# Altium PCB SG_CAN_Board2.PcbDoc (part 1 of 2)
Units mil, origin at the board's own origin, x right, y up, seen from the top; angles counter-clockwise.
Board outline 6000 x 2800 mil, 4 copper layers (Top Layer, Int1 (GND), Int2 (PWR), Bottom Layer), stack 53.911 mil thick; 153 components, 115 nets, 479 pads, 87 vias.
Unrouted connection lines stored in the file: 153.
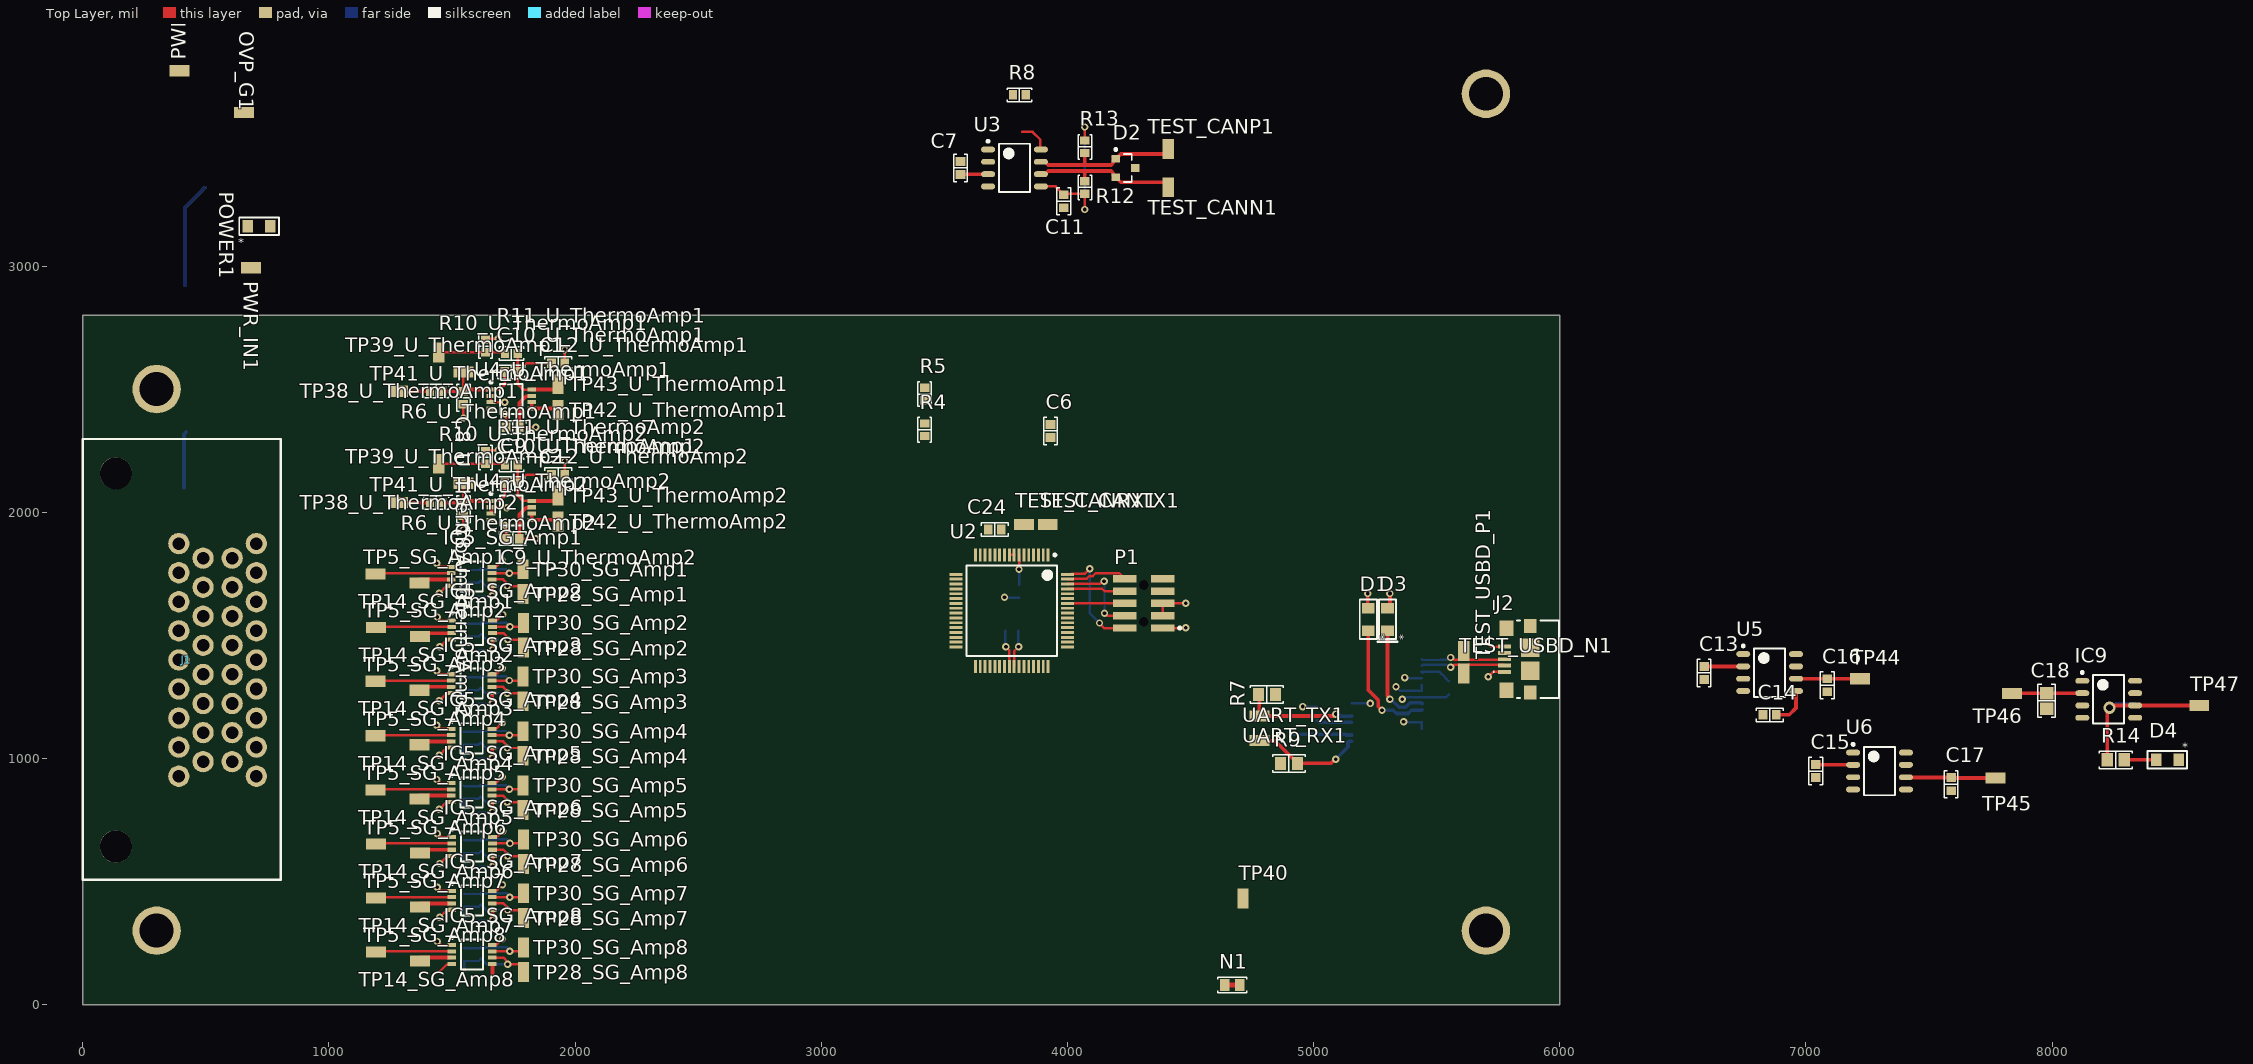
[diagram p0: Top Layer view]
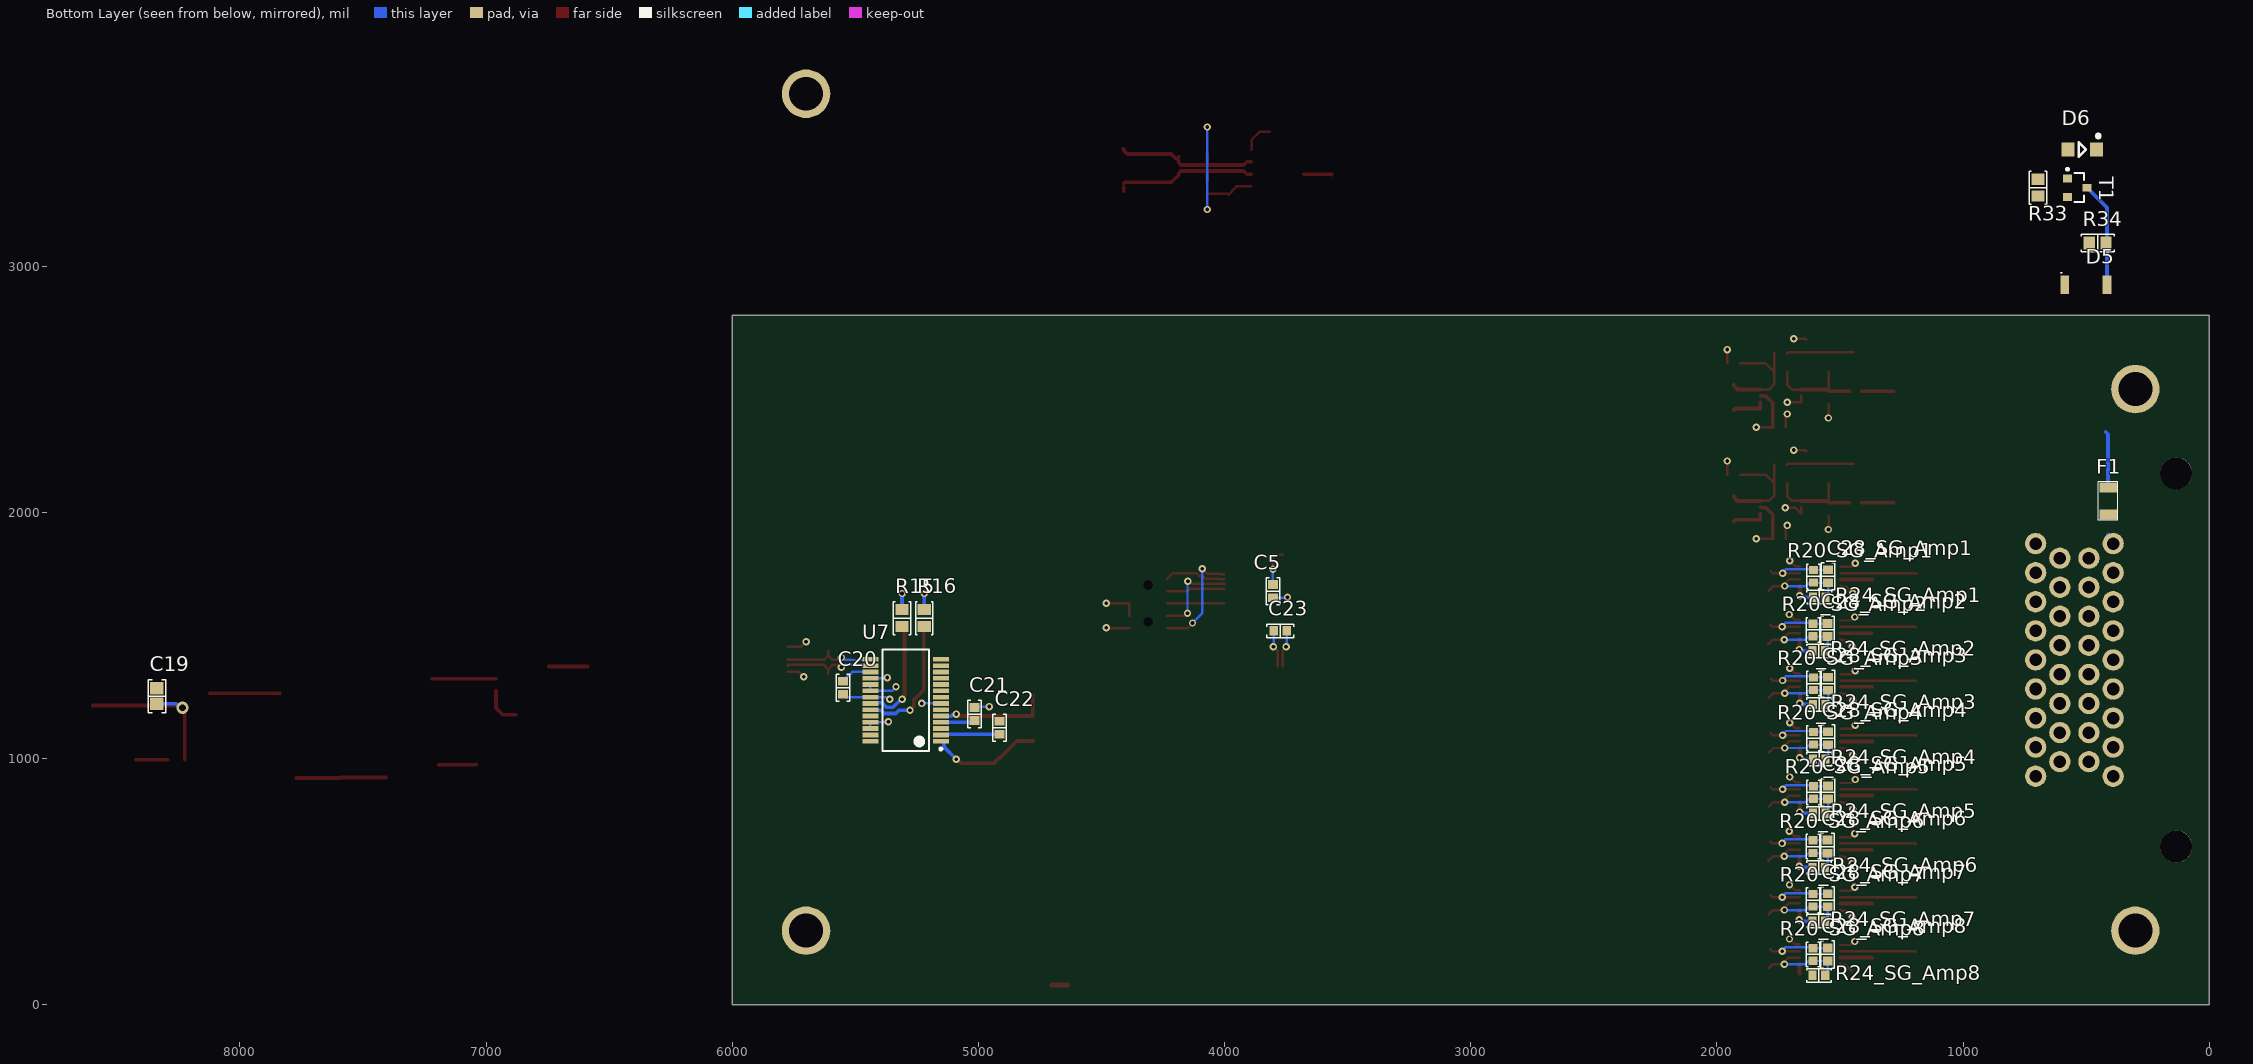
[diagram p1: Bottom Layer view, seen from below]
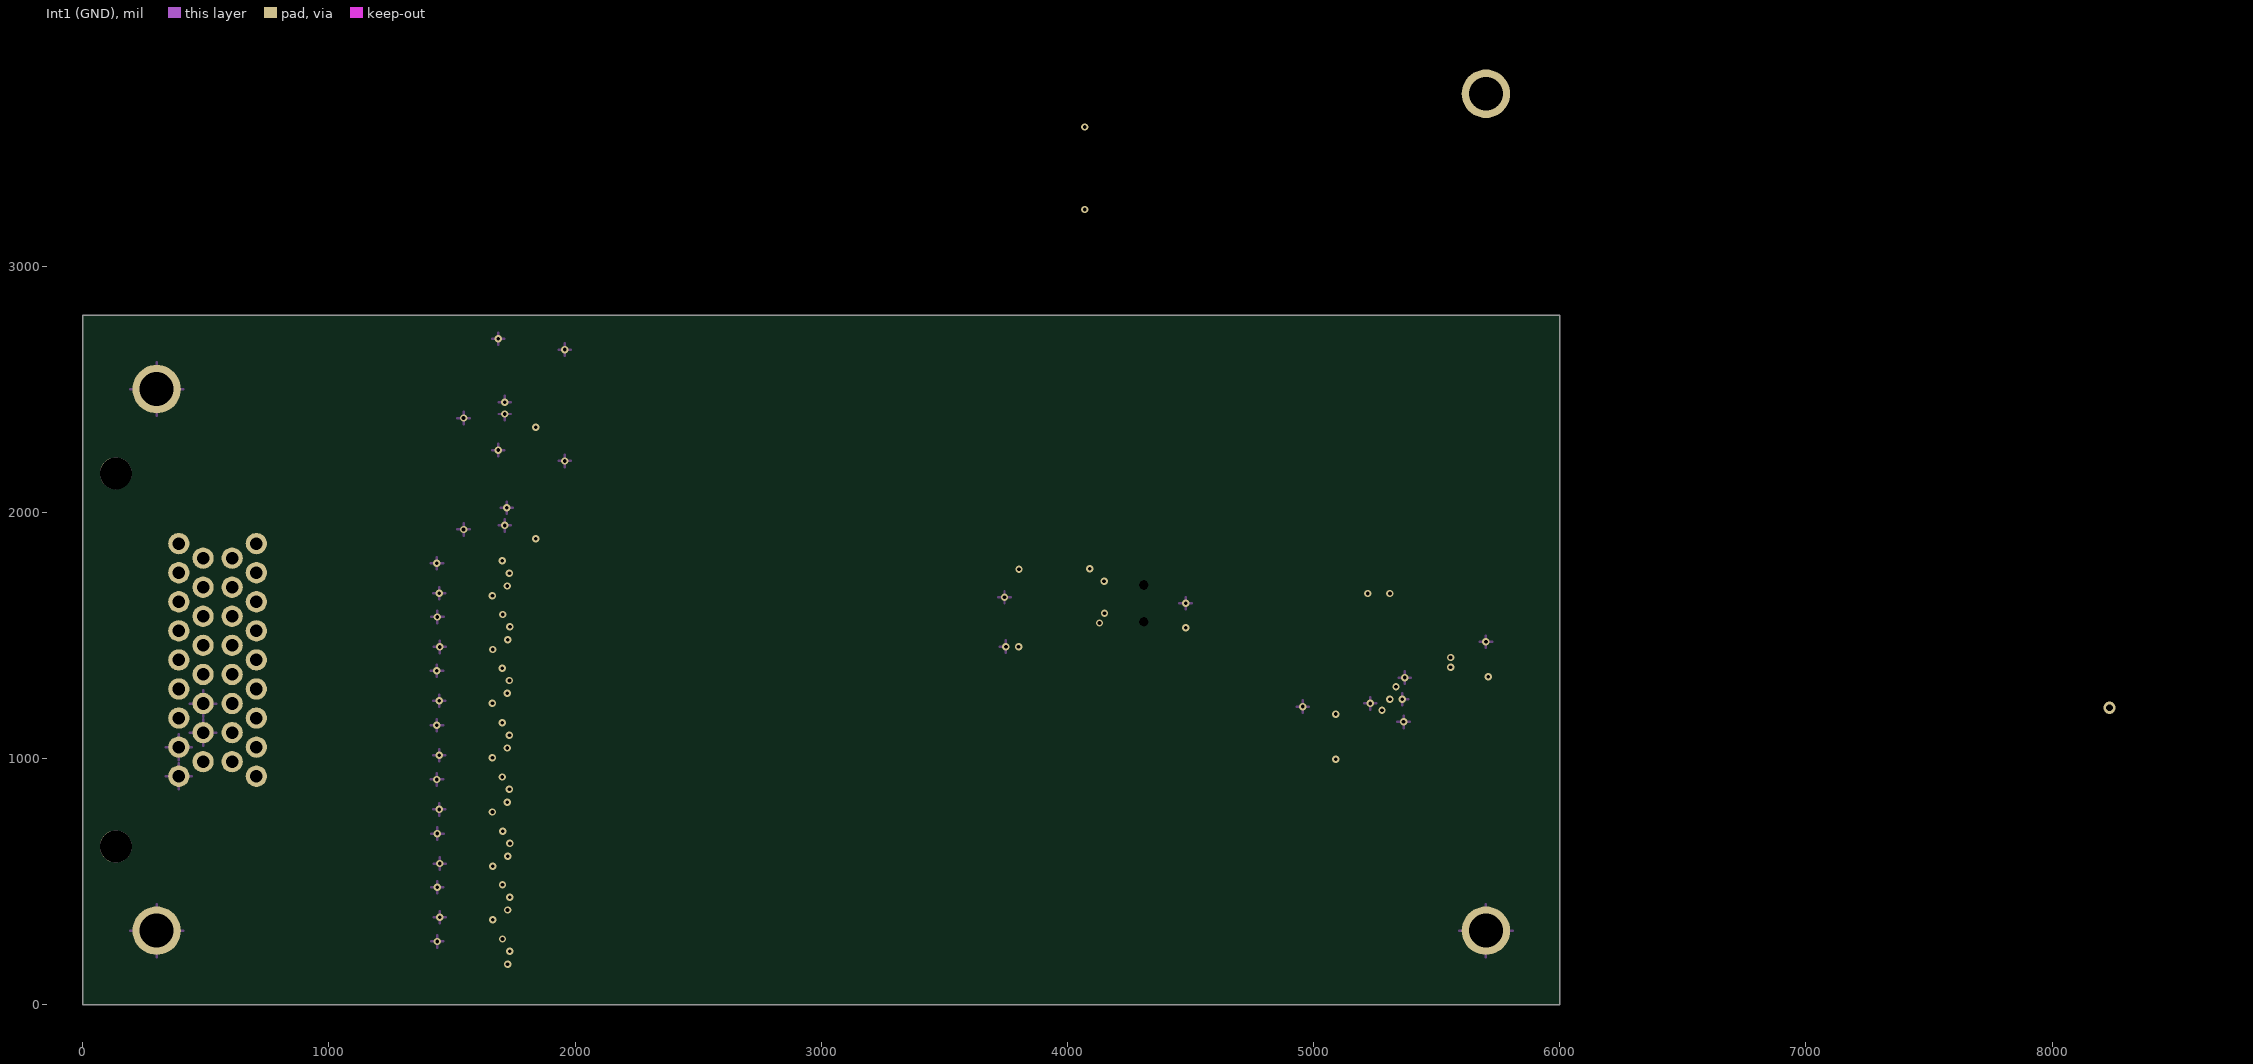
[diagram p2: Int1 (GND)]
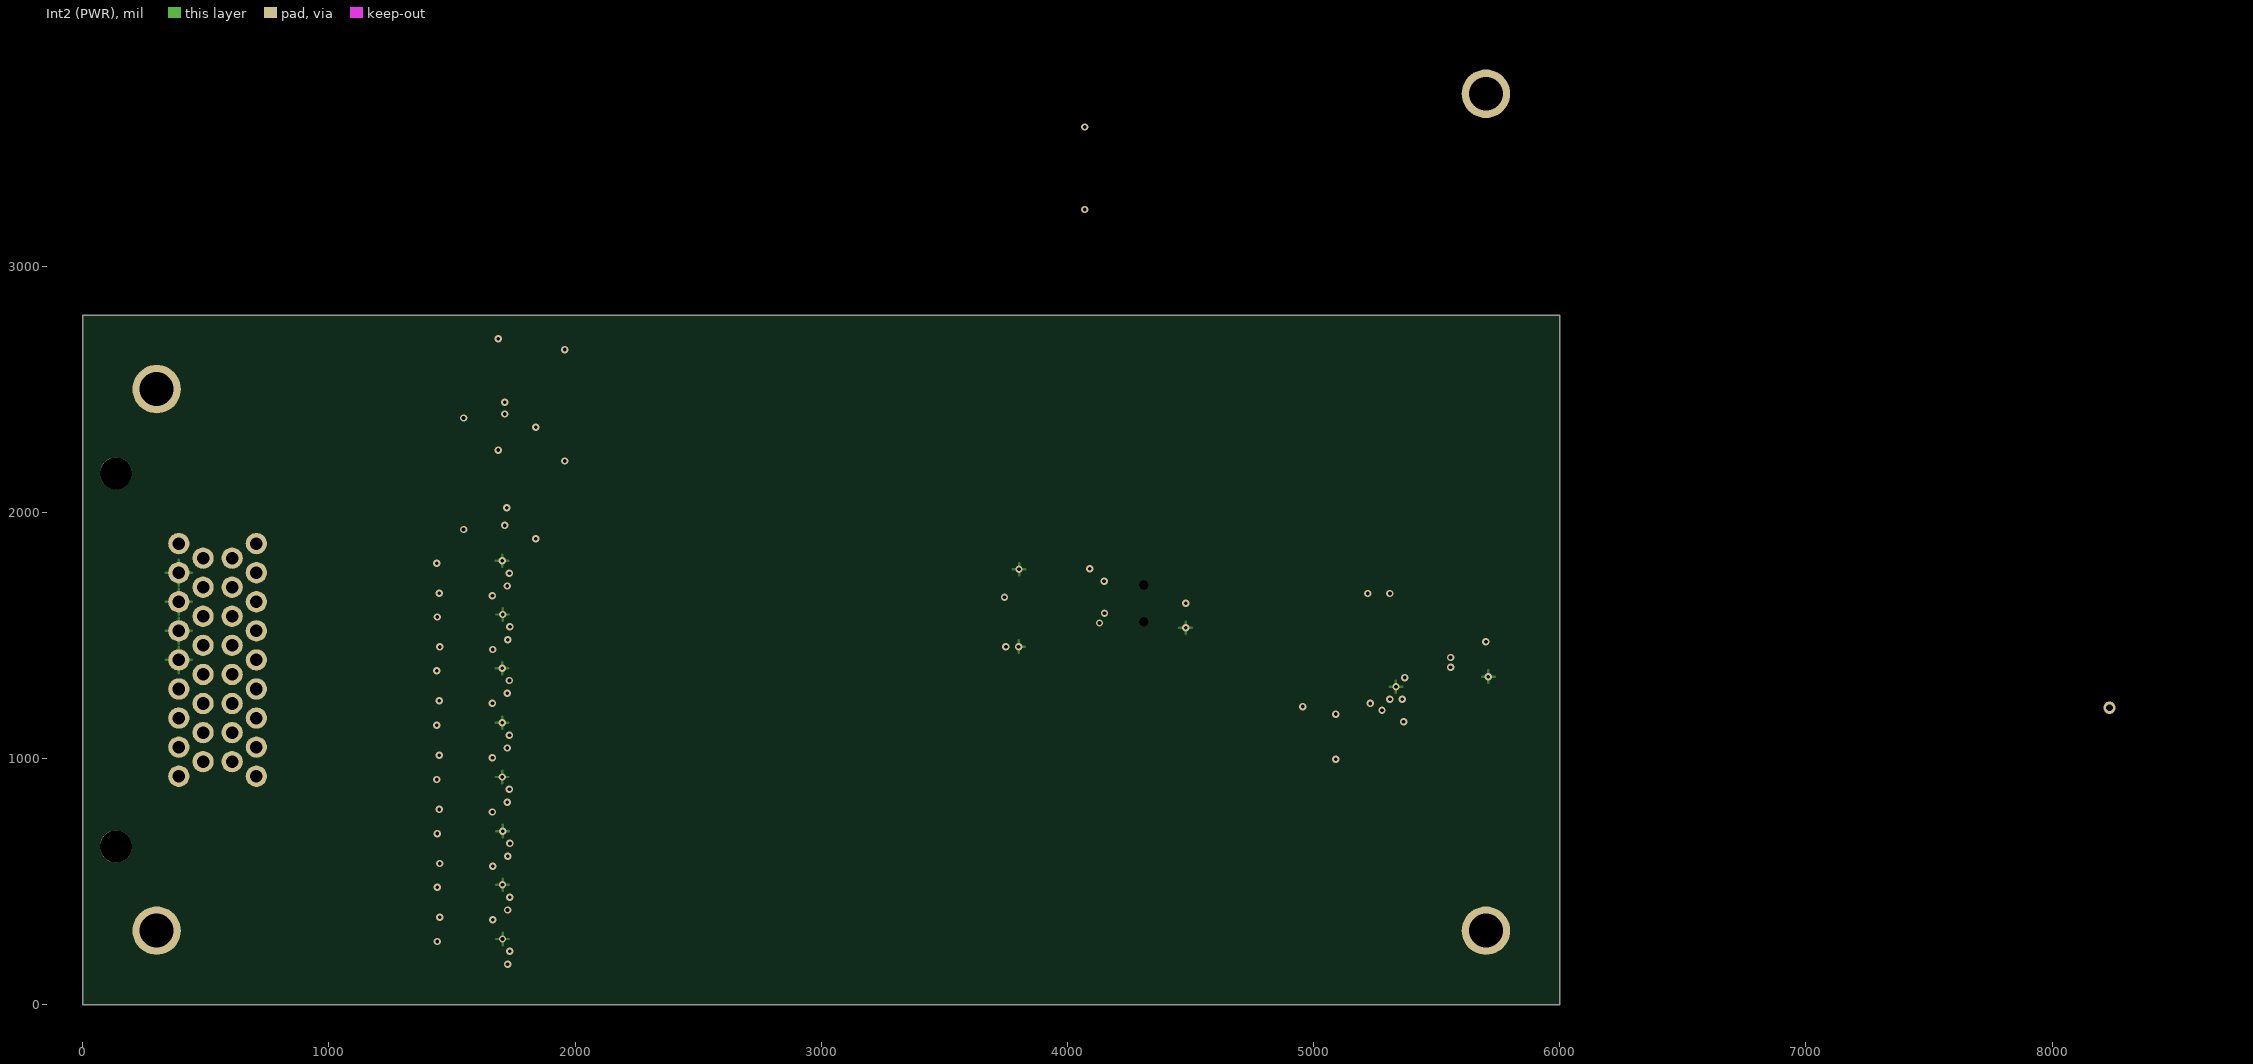
[diagram p3: Int2 (PWR)]

## Layer stack, top to bottom
Top Solder: solder mask 1, SM-001, Dk 4
Top Layer: signal copper 1.3778
Dielectric 1: prepreg 5.1, PP-017, Dk 4.3
Dielectric 2: prepreg 5.1, PP-017, Dk 4.3
Int1 (GND): signal copper 1.3778
Dielectric 3: core 28, Core-039, Dk 4.8
Int2 (PWR): signal copper 1.3778
Dielectric 4: prepreg 5.1, PP-017, Dk 4.3
Dielectric 5: prepreg 5.1, PP-017, Dk 4.3
Bottom Layer: signal copper 1.3778
Bottom Solder: solder mask 1, SM-001, Dk 4

## Board outline
0,0 6000,0 6000,2800 0,2800

## Design rules (kind name [scope] priority, off if disabled: settings)
Clearance [InNetClass('All Nets')] p1: gap=10 ignorepadtopadclearanceinfootprint=FALSE except(6: Arc-SMDPad Track-SMDPad SMDPad-SMDPad)
DiffPairsRouting [All] p1: maxlimit=100 minlimit=10 mostfreqgap=10 toplayer_minwidth=10 toplayer_maxwidth=100 toplayer_prefwidth=15 midlayer1_maxgap=10 midlayer1_minwidth=15 midlayer1_maxwidth=15 midlayer1_prefwidth=15 midlayer2_maxgap=10 midlayer2_minwidth=15 midlayer2_maxwidth=15 midlayer2_prefwidth=15 bottomlayer_minwidth=10 bottomlayer_maxwidth=100 bottomlayer_prefwidth=15 maxuncoupledlength=500
FabricationTestPointUsage TestPointUsage [All] p1: valid=0 allowmultiple=FALSE
FabricationTestPointUsage [All] p2: valid=0 allowmultiple=FALSE
FabricationTestpoint Testpoint [All] p1: side=3 testpointundercomponent=TRUE minsize=40 maxsize=100 preferedsize=60 minholesize=20 maxholesize=40 preferedholesize=32 testpointgrid=1 allowsidetop=TRUE allowsidebottom=TRUE usegrid=TRUE gridtolerance=0.01
FabricationTestpoint [All] p2: side=3 testpointundercomponent=TRUE minsize=40 maxsize=100 preferedsize=60 minholesize=0 maxholesize=40 preferedholesize=32 testpointgrid=1 allowsidetop=TRUE allowsidebottom=TRUE usegrid=TRUE gridtolerance=0.01
HoleSize [All] p1: absolutevalues=TRUE maxlimit=247 minlimit=10 maxpercent=80.000 minpercent=20.000
MatchedLengths "Schematic Matched Net Lengths" [InNet('D_N')] p1: tolerance=10 checknetsindiffpair=FALSE checkdiffpairvsdiffpair=TRUE checkxsignals=TRUE checkothers=TRUE
PasteMaskExpansion PasteMaskExpansion_1 [InComponent('P1')] p1: expansion=-150
PasteMaskExpansion [All] p2: expansion=0
PlaneClearance [All] p1: clearance=10
PlaneConnect [All] p1: planeconnectstyle=Relief reliefexpansion=15 reliefentries=4 reliefconductorwidth=10 reliefairgap=10
PolygonConnect [All] p1: connectstyle=Relief reliefconductorwidth=10 reliefentries=4 polygonreliefangle="90 Angle" airgapwidth=10
RoomDefinition U_RVP_OVP_LC [InComponentClass('U_RVP_OVP_LC')] p1: confinementstyle=ConfineIn formatcopy=TRUE lockcomponents=FALSE outline 825.94,4083.42 825.94,2803.42 -119.06,2803.42 -119.06,4083.42
RoomDefinition SG_CAN_System [InComponentClass('SG_CAN_System')] p2: confinementstyle=ConfineIn formatcopy=TRUE lockcomponents=FALSE outline 4299.49,40 5089.49,40 5089.49,530 4299.49,530
RoomDefinition SG_Amp8 [InComponentClass('SG_Amp8')] p3: confinementstyle=ConfineIn formatcopy=TRUE lockcomponents=FALSE outline 1115.98,72.17 2160.98,72.17 2160.98,288.74 1115.98,288.74
RoomDefinition SG_Amp7 [InComponentClass('SG_Amp7')] p4: confinementstyle=ConfineIn formatcopy=TRUE lockcomponents=FALSE outline 1115.98,292.17 2160.98,292.17 2160.98,508.74 1115.98,508.74
RoomDefinition SG_Amp6 [InComponentClass('SG_Amp6')] p5: confinementstyle=ConfineIn formatcopy=TRUE lockcomponents=FALSE outline 1116.28,510.39 2161.28,510.39 2161.28,726.96 1116.28,726.96
RoomDefinition SG_Amp5 [InComponentClass('SG_Amp5')] p6: confinementstyle=ConfineIn formatcopy=TRUE lockcomponents=FALSE outline 1114.35,730.32 2159.35,730.32 2159.35,946.89 1114.35,946.89
RoomDefinition SG_Amp4 [InComponentClass('SG_Amp4')] p7: confinementstyle=ConfineIn formatcopy=TRUE lockcomponents=FALSE outline 1114.35,950.39 2159.35,950.39 2159.35,1166.96 1114.35,1166.96
RoomDefinition SG_Amp3 [InComponentClass('SG_Amp3')] p8: confinementstyle=ConfineIn formatcopy=TRUE lockcomponents=FALSE outline 1114.35,1172.17 2159.35,1172.17 2159.35,1388.74 1114.35,1388.74
RoomDefinition SG_Amp2 [InComponentClass('SG_Amp2')] p9: confinementstyle=ConfineIn formatcopy=TRUE lockcomponents=FALSE outline 1116.28,1390.39 2161.28,1390.39 2161.28,1606.96 1116.28,1606.96
RoomDefinition SG_Amp1 [InComponentClass('SG_Amp1')] p10: confinementstyle=ConfineIn formatcopy=TRUE lockcomponents=FALSE outline 1114.35,1608.3 2159.35,1608.3 2159.35,1824.88 1114.35,1824.88
RoomDefinition U_USB [InComponentClass('U_USB')] p11: confinementstyle=ConfineIn formatcopy=TRUE lockcomponents=FALSE outline 4542.05,950 6020,950 6020,2050 4542.05,2050
RoomDefinition U_ThermoAmp2 [InComponentClass('U_ThermoAmp2')] p12: confinementstyle=ConfineIn formatcopy=TRUE lockcomponents=FALSE outline 1215.89,1837.44 2015.89,1837.44 2015.89,2287.44 1215.89,2287.44
RoomDefinition U_ThermoAmp1 [InComponentClass('U_ThermoAmp1')] p13: confinementstyle=ConfineIn formatcopy=TRUE lockcomponents=FALSE outline 1215.89,2290 2015.89,2290 2015.89,2740 1215.89,2740
RoomDefinition U_SG_Power_Supplies [InComponentClass('U_SG_Power_Supplies')] p14: confinementstyle=ConfineIn formatcopy=TRUE lockcomponents=FALSE outline 6497.6,543.58 9202.6,543.58 9202.6,1783.58 6497.6,1783.58
RoomDefinition U_MCU_MKE185F512VLH16 [InComponentClass('U_MCU_MKE185F512VLH16')] p15: confinementstyle=ConfineIn formatcopy=TRUE lockcomponents=FALSE outline 4450,795 4450,2725 3287.24,2725 3287.24,795
RoomDefinition U_CAN_Tranceiver [InComponentClass('U_CAN_Tranceiver')] p16: confinementstyle=ConfineIn formatcopy=TRUE lockcomponents=FALSE outline 3505.47,3108.42 4575.47,3108.42 4575.47,3738.42 3505.47,3738.42
RoomDefinition U_36Pin_SuperSeal_Conn [InComponentClass('U_36Pin_SuperSeal_Conn')] p17: confinementstyle=ConfineIn formatcopy=TRUE lockcomponents=FALSE outline 995.75,2978.58 -3480,2978.58 -3480,433.07 995.75,433.07
RoutingVias [All] p1: holewidth=15 width=30 viastyle="Through Hole" minholewidth=10 minwidth=20 maxholewidth=15 maxwidth=50
SilkToSolderMaskClearance SilkscreenOverComponentPads [IsPad] p1: minsilkscreentomaskgap=10 clearancetoexposedcopper=TRUE
SilkToSolderMaskClearance [IsPad] p2: minsilkscreentomaskgap=10 clearancetoexposedcopper=TRUE
SolderMaskExpansion [All] p1: expansion=5
UnRoutedNet [All] p1: checkbadconnections=TRUE
Width [All] p1: maxlimit=150 minlimit=5 preferedwidth=15 toplayer_minwidth=10 bottomlayer_minwidth=10 minimp=50.000000 maximp=50.000000 favimp=50.000000
21 further rules are at their usual default settings.

## Classes and differential pairs
channel class SG_Amplifiers_LTC2053: SG_Amp1 SG_Amp2 SG_Amp3 SG_Amp4 SG_Amp5 SG_Amp6 SG_Amp7 SG_Amp8
net class TC-[1..2]: TC-1 TC-2 TC-3 TC-4 TC-5 TC-6 TC-7 TC-8
net class TC+[1..2]: TC+1 TC+2 TC+3 TC+4 TC+5 TC+6 TC+7 TC+8
component class SG_CAN_System: N1 TP40
component class SG_Amp8: C28_SG_Amp8 IC5_SG_Amp8 R20_SG_Amp8 R24_SG_Amp8 TP5_SG_Amp8 TP14_SG_Amp8 TP28_SG_Amp8 TP30_SG_Amp8
component class SG_Amp7: C28_SG_Amp7 IC5_SG_Amp7 R20_SG_Amp7 R24_SG_Amp7 TP5_SG_Amp7 TP14_SG_Amp7 TP28_SG_Amp7 TP30_SG_Amp7
component class SG_Amp6: C28_SG_Amp6 IC5_SG_Amp6 R20_SG_Amp6 R24_SG_Amp6 TP5_SG_Amp6 TP14_SG_Amp6 TP28_SG_Amp6 TP30_SG_Amp6
component class SG_Amp5: C28_SG_Amp5 IC5_SG_Amp5 R20_SG_Amp5 R24_SG_Amp5 TP5_SG_Amp5 TP14_SG_Amp5 TP28_SG_Amp5 TP30_SG_Amp5
component class SG_Amp4: C28_SG_Amp4 IC5_SG_Amp4 R20_SG_Amp4 R24_SG_Amp4 TP5_SG_Amp4 TP14_SG_Amp4 TP28_SG_Amp4 TP30_SG_Amp4
component class SG_Amp3: C28_SG_Amp3 IC5_SG_Amp3 R20_SG_Amp3 R24_SG_Amp3 TP5_SG_Amp3 TP14_SG_Amp3 TP28_SG_Amp3 TP30_SG_Amp3
component class SG_Amp2: C28_SG_Amp2 IC5_SG_Amp2 R20_SG_Amp2 R24_SG_Amp2 TP5_SG_Amp2 TP14_SG_Amp2 TP28_SG_Amp2 TP30_SG_Amp2
component class SG_Amp1: C28_SG_Amp1 IC5_SG_Amp1 R20_SG_Amp1 R24_SG_Amp1 TP5_SG_Amp1 TP14_SG_Amp1 TP28_SG_Amp1 TP30_SG_Amp1 TP$$$
channel class ThermocoupleAmplifiersAD8494: U_ThermoAmp1 U_ThermoAmp2
net class TCO[1..2]: TCO1 TCO2
net class SGO[1..8]: SGO1 SGO2 SGO3 SGO4 SGO5 SGO6 SGO7 SGO8
net class SG-[1..8]: SG-1 SG-2 SG-3 SG-4 SG-5 SG-6 SG-7 SG-8
net class SG+[1..8]: SG+1 SG+2 SG+3 SG+4 SG+5 SG+6 SG+7 SG+8
component class U_USB: C20 C21 C22 D1 D3 J2 R7 R9 R15 R16 TEST_USBD_N1 TEST_USBD_P1 U7 UART_RX1 UART_TX1
component class U_ThermoAmp2: C8_U_ThermoAmp2 C9_U_ThermoAmp2 C10_U_ThermoAmp2 C12_U_ThermoAmp2 R6_U_ThermoAmp2 R10_U_ThermoAmp2 R11_U_ThermoAmp2 TP38_U_ThermoAmp2 TP39_U_ThermoAmp2 TP41_U_ThermoAmp2 TP42_U_ThermoAmp2 TP43_U_ThermoAmp2 U4_U_ThermoAmp2
component class U_ThermoAmp1: C8_U_ThermoAmp1 C9_U_ThermoAmp1 C10_U_ThermoAmp1 C12_U_ThermoAmp1 R6_U_ThermoAmp1 R10_U_ThermoAmp1 R11_U_ThermoAmp1 TP38_U_ThermoAmp1 TP39_U_ThermoAmp1 TP41_U_ThermoAmp1 TP42_U_ThermoAmp1 TP43_U_ThermoAmp1 U4_U_ThermoAmp1
component class U_SG_Power_Supplies: C13 C14 C15 C16 C17 C18 C19 D4 IC9 R14 TP44 TP45 TP46 TP47 U5 U6
component class U_RVP_OVP_LC: D5 D6 OVP_G1 POWER1 PWR_IN1 PWR_OUT1 R33 R34 T1
component class U_MCU_MKE185F512VLH16: C5 C6 C23 C24 P1 R4 R5 TEST_CANRX1 TEST_CANTX1 U2
component class U_CAN_Tranceiver: C7 C11 D2 R8 R12 R13 TEST_CANN1 TEST_CANP1 U3
component class U_36Pin_SuperSeal_Conn: F1 J1
differential pair D: +D_P -D_N
differential pair CAN: +CAN_P -CAN_N

## Components (designator, comment, footprint, x,y, rotation, side; value= is the part's Value field where it differs from the comment)
C5 "Capacitor MLCC 0.10uf 25V CAP 0603/1608" "CAP 0603/1608" 3803.31,1679.53 r90 bottom value=0.10uf (schematic designator C6)
C6 "Capacitor MLCC 0.10uf 16V CAP 0603/1608" "CAP 0603/1608" 3931.42,2330 r270 top value=0.10uf (schematic designator C13)
C7 "Capacitor MLCC 0.10uf 50V CAP 0603/1608" "CAP 0603/1608" 3565.47,3398.42 r270 top value=0.10uf (schematic designator C9)
C8_U_ThermoAmp1 "Capacitor MLCC 1000pf 16V CAP 0603/1608" "CAP 0603/1608" 1545.89,2465 r90 top value=1000pf (schematic designator C8)
C8_U_ThermoAmp2 "Capacitor MLCC 1000pf 16V CAP 0603/1608" "CAP 0603/1608" 1545.89,2012.44 r90 top value=1000pf (schematic designator C8)
C9_U_ThermoAmp1 "Capacitor MLCC 0.10uf 16V CAP 0603/1608" "CAP 0603/1608" 1745.89,2345 r0 top value=0.10uf (schematic designator C9)
C9_U_ThermoAmp2 "Capacitor MLCC 0.10uf 16V CAP 0603/1608" "CAP 0603/1608" 1745.89,1892.44 r0 top value=0.10uf (schematic designator C9)
C10_U_ThermoAmp1 "Capacitor MLCC 0.010uf 16V CAP 0603/1608" "CAP 0603/1608" 1740.89,2570 r0 top value=0.010uf (schematic designator C10)
C10_U_ThermoAmp2 "Capacitor MLCC 0.010uf 16V CAP 0603/1608" "CAP 0603/1608" 1740.89,2117.44 r0 top value=0.010uf (schematic designator C10)
C11 "Capacitor MLCC 4700pf 50V CAP 0603/1608" "CAP 0603/1608" 3985,3263.43 r90 top value=4700pf (schematic designator C14)
C12_U_ThermoAmp1 "Capacitor MLCC 1000pf 16V CAP 0603/1608" "CAP 0603/1608" 1930.89,2605 r0 top value=1000pf (schematic designator C12)
C12_U_ThermoAmp2 "Capacitor MLCC 1000pf 16V CAP 0603/1608" "CAP 0603/1608" 1930.89,2152.44 r0 top value=1000pf (schematic designator C12)
C13 "Capacitor MLCC 1.0uf 25V CAP 0603/1608" "CAP 0603/1608" 6586.57,1347.01 r90 top value=1.0uf (schematic designator C16)
C14 "Capacitor MLCC 1.0uf 25V CAP 0603/1608" "CAP 0603/1608" 6852.6,1177.01 r0 top value=1.0uf (schematic designator C17)
C15 "Capacitor MLCC 2.2uf 25V CAP 0603/1608" "CAP 0603/1608" 7040,948.58 r90 top value=2.2uf (schematic designator C18)
C16 "Capacitor MLCC 22uf 16V CAP 0603/1608" "CAP 0603/1608" 7086.57,1297.01 r90 top value=22uf (schematic designator C19)
C17 "Capacitor MLCC 2.2uf 25V CAP 0603/1608" "CAP 0603/1608" 7590,895.58 r90 top value=2.2uf (schematic designator C20)
C18 "Capacitor MLCC 2.2uf 25V CAP 0805/2012" "CAP 0805/2012" 7977.84,1233.58 r90 top value=2.2uf (schematic designator C21)
C19 "Capacitor MLCC 2.2uf 25V CAP 0805/2012" "CAP 0805/2012" 8337.28,1253.27 r270 bottom value=2.2uf (schematic designator C22)
C20 "Capacitor MLCC 0.10uf 25V CAP 0603/1608" "CAP 0603/1608" 5550,1286.57 r90 bottom value=0.10uf (schematic designator C1)
C21 "Capacitor MLCC 0.10uf 25V CAP 0603/1608" "CAP 0603/1608" 5016.14,1180 r270 bottom value=0.10uf (schematic designator C32)
C22 "Capacitor MLCC 0.10uf 25V CAP 0603/1608" "CAP 0603/1608" 4913.94,1124.13 r90 bottom value=0.10uf (schematic designator C31)
C23 "Capacitor MLCC 100pf 25V CAP 0603/1608" "CAP 0603/1608" 3773.79,1518.11 r0 bottom value=100pf (schematic designator C7)
C24 "Capacitor MLCC 0.10uf 25V CAP 0603/1608" "CAP 0603/1608" 3704.89,1930 r0 top value=0.10uf (schematic designator C8)
C28_SG_Amp1 "Capacitor MLCC 0.015uf 25V CAP 0603/1608" "CAP 0603/1608" 1548.37,1739.61 r90 bottom value=0.015uf (schematic designator C28)
C28_SG_Amp2 "Capacitor MLCC 0.015uf 25V CAP 0603/1608" "CAP 0603/1608" 1550.3,1521.69 r90 bottom value=0.015uf (schematic designator C28)
C28_SG_Amp3 "Capacitor MLCC 0.015uf 25V CAP 0603/1608" "CAP 0603/1608" 1548.37,1303.47 r90 bottom value=0.015uf (schematic designator C28)
C28_SG_Amp4 "Capacitor MLCC 0.015uf 25V CAP 0603/1608" "CAP 0603/1608" 1548.37,1081.69 r90 bottom value=0.015uf (schematic designator C28)
C28_SG_Amp5 "Capacitor MLCC 0.015uf 25V CAP 0603/1608" "CAP 0603/1608" 1548.37,861.62 r90 bottom value=0.015uf (schematic designator C28)
C28_SG_Amp6 "Capacitor MLCC 0.015uf 25V CAP 0603/1608" "CAP 0603/1608" 1550.3,641.69 r90 bottom value=0.015uf (schematic designator C28)
C28_SG_Amp7 "Capacitor MLCC 0.015uf 25V CAP 0603/1608" "CAP 0603/1608" 1550,423.47 r90 bottom value=0.015uf (schematic designator C28)
C28_SG_Amp8 "Capacitor MLCC 0.015uf 25V CAP 0603/1608" "CAP 0603/1608" 1550,203.47 r90 bottom value=0.015uf (schematic designator C28)
D1 "" 0805_LED 5222.48,1564.13 r270 top value=Green (schematic designator D2)
D2 "NUP1105LT1G" "SOT-23 (TO-236)" 4235.47,3398.43 r0 top value=TVS_24V (schematic designator D3)
D3 "" 0805_LED 5300,1564.13 r270 top value=Red (schematic designator D1)
D4 "LED" 0805_LED 8468.85,994.26 r0 top value=Green (schematic designator D6)
D5 "DIODE" SOD-128 500.94,2923.42 r180 bottom value=5A (schematic designator D2)
D6 "DDZ9701-7" SOD123F 515.47,3473.42 r180 bottom value=14Vz (schematic designator D1)
F1 "1A" "PTC Fuse 1206/3216" 410.71,2045.51 r90 bottom
IC5_SG_Amp1 "" MSOP-8 1579.35,1739.6 r0 top (schematic designator IC5)
IC5_SG_Amp2 "" MSOP-8 1581.28,1521.69 r0 top (schematic designator IC5)
IC5_SG_Amp3 "" MSOP-8 1579.35,1303.47 r0 top (schematic designator IC5)
IC5_SG_Amp4 "" MSOP-8 1579.35,1081.69 r0 top (schematic designator IC5)
IC5_SG_Amp5 "" MSOP-8 1579.35,861.62 r0 top (schematic designator IC5)
IC5_SG_Amp6 "" MSOP-8 1581.28,641.69 r0 top (schematic designator IC5)
IC5_SG_Amp7 "" MSOP-8 1580.98,423.47 r0 top (schematic designator IC5)
IC5_SG_Amp8 "" MSOP-8 1580.98,203.47 r0 top (schematic designator IC5)
IC9 "MAX6350CSA+ 5V" SOIC-8 8230,1240 r0 top value=5V (schematic designator IC1)
J1 "CONN Superseal 34POS" "Superseal 34POS" 704.96,1872.44 r270 top locked value=CONN (schematic designator J2)
J2 "1981568-1" TECO-1981568-5_V 5774.68,1402.76 r90 top locked value=CONN (schematic designator J1)
N1 "" Net_Tie 4669.49,80 r0 top
OVP_G1 "RCU-0C" RCU-0C 655.47,3623.42 r90 top
P1 "5103309-1" HDR2X5_SMT 4310,1629.53 r90 top value=CONN
POWER1 "LED" 0805_LED 715.47,3162 r180 top value=Green
PWR_IN1 "RCU-0C" RCU-0C 682.87,2993.42 r270 top
PWR_OUT1 "RCU-0C" RCU-0C 392.87,3793.42 r90 top
R4 "Resistor 10k 0603 1/10W 1%" "RES 0603/1608" 3420,2335 r90 top value=10k (schematic designator R13)
R5 "Resistor 10k 0603 1/10W 5%" "RES 0603/1608" 3420,2480 r270 top value=10k (schematic designator R12)
R6_U_ThermoAmp1 "Resistor 10k 0603 1/10W 10%" "RES 0603/1608" 1435.89,2491.57 r0 top value=10k (schematic designator R6)
R6_U_ThermoAmp2 "Resistor 10k 0603 1/10W 10%" "RES 0603/1608" 1435.89,2039.02 r0 top value=10k (schematic designator R6)
R7 "Resistor 1.0k 0805 1/4W 1%" "RES 0805/2012" 4810,1260 r0 top value=1.0k (schematic designator R2)
R8 "Resistor 100 0603 1/10W 10%" "RES 0603/1608" 3804.57,3695.59 r0 top value=100 (schematic designator R7)
R9 "Resistor 1.0k 0805 1/4W 1%" "RES 0805/2012" 4900,980 r180 top value=1.0k (schematic designator R1)
R10_U_ThermoAmp1 "Resistor 1.0M 0603 1/10W 5%" "RES 0603/1608" 1635.89,2675 r270 top value=1.0M (schematic designator R10)
R10_U_ThermoAmp2 "Resistor 1.0M 0603 1/10W 5%" "RES 0603/1608" 1635.89,2222.44 r270 top value=1.0M (schematic designator R10)
R11_U_ThermoAmp1 "Resistor 10k 0603 1/10W 10%" "RES 0603/1608" 1740.89,2645 r180 top value=10k (schematic designator R11)
R11_U_ThermoAmp2 "Resistor 10k 0603 1/10W 10%" "RES 0603/1608" 1740.89,2192.44 r180 top value=10k (schematic designator R11)
R12 "Resistor 62 0603 1/10W 5%" "RES 0603/1608" 4070.47,3319.37 r270 top value=62 (schematic designator R10)
R13 "Resistor 62 0603 1/10W 5%" "RES 0603/1608" 4070.47,3484.37 r270 top value=62 (schematic designator R11)
R14 "Resistor 470 0805 1/10W 1%" "RES 0805/2012" 8258.54,994.25 r0 top value=470 (schematic designator R1)
R15 "Resistor 1.0k 0805 1/4W 1%" "RES 0805/2012" 5310,1570.08 r270 bottom value=1.0k (schematic designator R32)
R16 "Resistor 1.0k 0805 1/4W 1%" "RES 0805/2012" 5220,1570.08 r270 bottom value=1.0k (schematic designator R31)
R20_SG_Amp1 "Resistor 10k 0603 1/10W 1%" "RES 0603/1608" 1607.89,1739.6 r90 bottom value=10k (schematic designator R20)
R20_SG_Amp2 "Resistor 10k 0603 1/10W 1%" "RES 0603/1608" 1609.82,1521.69 r90 bottom value=10k (schematic designator R20)
R20_SG_Amp3 "Resistor 10k 0603 1/10W 1%" "RES 0603/1608" 1607.89,1303.47 r90 bottom value=10k (schematic designator R20)
R20_SG_Amp4 "Resistor 10k 0603 1/10W 1%" "RES 0603/1608" 1607.89,1081.69 r90 bottom value=10k (schematic designator R20)
R20_SG_Amp5 "Resistor 10k 0603 1/10W 1%" "RES 0603/1608" 1607.89,861.62 r90 bottom value=10k (schematic designator R20)
R20_SG_Amp6 "Resistor 10k 0603 1/10W 1%" "RES 0603/1608" 1609.82,641.69 r90 bottom value=10k (schematic designator R20)
R20_SG_Amp7 "Resistor 10k 0603 1/10W 1%" "RES 0603/1608" 1609.53,423.47 r90 bottom value=10k (schematic designator R20)
R20_SG_Amp8 "Resistor 10k 0603 1/10W 1%" "RES 0603/1608" 1609.53,203.47 r90 bottom value=10k (schematic designator R20)
R24_SG_Amp1 "Resistor 10 0603 1/10W 1%" "RES 0603/1608" 1583.88,1654.88 r180 bottom value=10 (schematic designator R24)
R24_SG_Amp2 "Resistor 10 0603 1/10W 1%" "RES 0603/1608" 1585.81,1436.96 r180 bottom value=10 (schematic designator R24)
R24_SG_Amp3 "Resistor 10 0603 1/10W 1%" "RES 0603/1608" 1583.88,1218.74 r180 bottom value=10 (schematic designator R24)
R24_SG_Amp4 "Resistor 10 0603 1/10W 1%" "RES 0603/1608" 1583.88,996.96 r180 bottom value=10 (schematic designator R24)
R24_SG_Amp5 "Resistor 10 0603 1/10W 1%" "RES 0603/1608" 1583.88,776.89 r180 bottom value=10 (schematic designator R24)
R24_SG_Amp6 "Resistor 10 0603 1/10W 1%" "RES 0603/1608" 1585.81,556.96 r180 bottom value=10 (schematic designator R24)
R24_SG_Amp7 "Resistor 10 0603 1/10W 1%" "RES 0603/1608" 1585.51,338.74 r180 bottom value=10 (schematic designator R24)
R24_SG_Amp8 "Resistor 10 0603 1/10W 1%" "RES 0603/1608" 1585.51,118.74 r180 bottom value=10 (schematic designator R24)
R33 "Resistor 47k 0805 1/10W 1%" "RES 0805/2012" 695.47,3318.42 r90 bottom value=47k (schematic designator R4)
R34 "Resistor 470 0805 1/10W 1%" "RES 0805/2012" 452.87,3093.42 r180 bottom value=470 (schematic designator R3)
T1 "DMG2302UK-7" SOT23-3 535.94,3318.42 r180 bottom value=N_Channel
TEST_CANN1 "RCU-0C" RCU-0C 4409.27,3320.27 r180 top
TEST_CANP1 "RCU-0C" RCU-0C 4409.27,3475.59 r180 top
TEST_CANRX1 "RCU-0C" RCU-0C 3823,1950 r270 top
TEST_CANTX1 "RCU-0C" RCU-0C 3920,1950 r270 top
TEST_USBD_N1 "RCU-0C" RCU-0C 5610,1344.06 r180 top
TEST_USBD_P1 "RCU-0C" RCU-0C 5610,1435.53 r180 top
TP5_SG_Amp1 "RCU-0C" RCU-0C 1189.35,1749.6 r90 top value=CONN (schematic designator TP5)
TP5_SG_Amp2 "RCU-0C" RCU-0C 1191.28,1531.69 r90 top value=CONN (schematic designator TP5)
TP5_SG_Amp3 "RCU-0C" RCU-0C 1189.35,1313.47 r90 top value=CONN (schematic designator TP5)
TP5_SG_Amp4 "RCU-0C" RCU-0C 1189.35,1091.69 r90 top value=CONN (schematic designator TP5)
TP5_SG_Amp5 "RCU-0C" RCU-0C 1189.35,871.62 r90 top value=CONN (schematic designator TP5)
TP5_SG_Amp6 "RCU-0C" RCU-0C 1191.28,651.69 r90 top value=CONN (schematic designator TP5)
TP5_SG_Amp7 "RCU-0C" RCU-0C 1190.98,433.47 r90 top value=CONN (schematic designator TP5)
TP5_SG_Amp8 "RCU-0C" RCU-0C 1190.98,213.47 r90 top value=CONN (schematic designator TP5)
TP14_SG_Amp1 "RCU-0C" RCU-0C 1368.37,1713.03 r90 top value=CONN (schematic designator TP14)
TP14_SG_Amp2 "RCU-0C" RCU-0C 1370.3,1495.12 r90 top value=CONN (schematic designator TP14)
TP14_SG_Amp3 "RCU-0C" RCU-0C 1368.37,1276.9 r90 top value=CONN (schematic designator TP14)
TP14_SG_Amp4 "RCU-0C" RCU-0C 1368.37,1055.12 r90 top value=CONN (schematic designator TP14)
TP14_SG_Amp5 "RCU-0C" RCU-0C 1368.37,835.05 r90 top value=CONN (schematic designator TP14)
TP14_SG_Amp6 "RCU-0C" RCU-0C 1370.3,615.12 r90 top value=CONN (schematic designator TP14)
TP14_SG_Amp7 "RCU-0C" RCU-0C 1370,396.9 r90 top value=CONN (schematic designator TP14)
TP14_SG_Amp8 "RCU-0C" RCU-0C 1370,176.9 r90 top value=CONN (schematic designator TP14)
TP28_SG_Amp1 "RCU-0C" RCU-0C 1788.36,1668.3 r180 top value=CONN (schematic designator TP28)
TP28_SG_Amp2 "RCU-0C" RCU-0C 1790.3,1450.39 r180 top value=CONN (schematic designator TP28)
TP28_SG_Amp3 "RCU-0C" RCU-0C 1788.36,1232.17 r180 top value=CONN (schematic designator TP28)
TP28_SG_Amp4 "RCU-0C" RCU-0C 1788.36,1010.39 r180 top value=CONN (schematic designator TP28)
TP28_SG_Amp5 "RCU-0C" RCU-0C 1788.36,790.32 r180 top value=CONN (schematic designator TP28)
TP28_SG_Amp6 "RCU-0C" RCU-0C 1790.3,570.39 r180 top value=CONN (schematic designator TP28)
TP28_SG_Amp7 "RCU-0C" RCU-0C 1790,352.17 r180 top value=CONN (schematic designator TP28)
TP28_SG_Amp8 "RCU-0C" RCU-0C 1790,132.17 r180 top value=CONN (schematic designator TP28)
TP30_SG_Amp1 "RCU-0C" RCU-0C 1788.37,1768.3 r0 top value=CONN (schematic designator TP30)
TP30_SG_Amp2 "RCU-0C" RCU-0C 1790.3,1550.39 r0 top value=CONN (schematic designator TP30)
TP30_SG_Amp3 "RCU-0C" RCU-0C 1788.37,1332.17 r0 top value=CONN (schematic designator TP30)
TP30_SG_Amp4 "RCU-0C" RCU-0C 1788.37,1110.39 r0 top value=CONN (schematic designator TP30)
TP30_SG_Amp5 "RCU-0C" RCU-0C 1788.37,890.32 r0 top value=CONN (schematic designator TP30)
TP30_SG_Amp6 "RCU-0C" RCU-0C 1790.3,670.39 r0 top value=CONN (schematic designator TP30)
TP30_SG_Amp7 "RCU-0C" RCU-0C 1790,452.17 r0 top value=CONN (schematic designator TP30)
TP30_SG_Amp8 "RCU-0C" RCU-0C 1790,232.17 r0 top value=CONN (schematic designator TP30)
TP38_U_ThermoAmp1 "RCU-0C" RCU-0C 1280.89,2491.57 r90 top value=CONN (schematic designator TP38)
TP38_U_ThermoAmp2 "RCU-0C" RCU-0C 1280.89,2039.02 r90 top value=CONN (schematic designator TP38)
TP39_U_ThermoAmp1 "RCU-0C" RCU-0C 1445.89,2649.41 r180 top value=CONN (schematic designator TP39)
TP39_U_ThermoAmp2 "RCU-0C" RCU-0C 1445.89,2196.85 r180 top value=CONN (schematic designator TP39)
TP40 "RCU-0C" RCU-0C 4712.8,430 r0 top value=CONN (schematic designator TP17)
TP41_U_ThermoAmp1 "RCU-0C" RCU-0C 1545.89,2570 r90 top value=CONN (schematic designator TP41)
TP41_U_ThermoAmp2 "RCU-0C" RCU-0C 1545.89,2117.44 r90 top value=CONN (schematic designator TP41)
TP42_U_ThermoAmp1 "RCU-0C" RCU-0C 1930.89,2415 r180 top value=CONN (schematic designator TP42)
TP42_U_ThermoAmp2 "RCU-0C" RCU-0C 1930.89,1962.44 r180 top value=CONN (schematic designator TP42)
TP43_U_ThermoAmp1 "RCU-0C" RCU-0C 1930.89,2520 r180 top value=CONN (schematic designator TP43)
TP43_U_ThermoAmp2 "RCU-0C" RCU-0C 1930.89,2067.44 r180 top value=CONN (schematic designator TP43)
TP44 "RCU-0C" RCU-0C 7220.36,1323.58 r90 top value=CONN (schematic designator TP5)
TP45 "RCU-0C" RCU-0C 7770,920 r90 top value=CONN (schematic designator TP4)
TP46 "RCU-0C" RCU-0C 7837.84,1263.58 r90 top value=CONN (schematic designator TP2)
TP47 "RCU-0C" RCU-0C 8597.84,1215 r90 top value=CONN (schematic designator TP3)
U2 "" TQFP64 3773.79,1600 r270 top (schematic designator U3)
U3 "MCP2561 CAN Transceiver" SOIC-8 3784.88,3398.43 r0 top value=CAN/UART (schematic designator U4)
U4_U_ThermoAmp1 "" MSOP-8 1740.89,2460 r0 top value=K-type (schematic designator U4)
U4_U_ThermoAmp2 "" MSOP-8 1740.89,2007.44 r0 top value=K-type (schematic designator U4)
U5 "REF5025" SOIC-8 6852.6,1348.58 r0 top value="2.5V Reference" (schematic designator U6)
U6 "LT1236-5 Voltage Reference" SOIC-8 7299.1,948.58 r0 top (schematic designator U7)
U7 "FT232RL" SSOP-28 5295.14,1236.02 r0 bottom (schematic designator U1)
UART_RX1 "RCU-0C" RCU-0C 4780,1172.05 r90 top
UART_TX1 "RCU-0C" RCU-0C 4780,1073.23 r90 top

## Footprints (in the part's own frame and the unit in brackets; to place one, negate y for a bottom-side part, rotate by r counter-clockwise, add the part's x,y. Pads: shape width x height; smd on the part's side, far side on the other; paste and mask are expansions set on the pad)
0805_LED [mm]
  rect 1.1x1.3 smd: 1(-1.15,0) 2(1.15,0)
  silkscreen extent -2.06,-0.89 2.03,0.89, body extent -1.05,-0.67 1.05,0.68, height 0.9
"CAP 0603/1608" [mm] "Chip Capacitor, 2-Leads, Body 1.60x0.80mm, IPC Medium Density"
  rect 0.9x1 smd: 1(-0.675,0) 2(0.675,0)
  silkscreen extent -1.4,-0.7 1.4,0.7, body extent -0.8,-0.41 0.8,0.41, height 0.82
"CAP 0805/2012" [mm] "Chip Capacitor, 2-Leads, Body 2.00x1.20mm, IPC Medium Density"
  rect 1.3x1.4 smd: 1(-0.8,0) 2(0.8,0)
  silkscreen extent -1.7,-0.9 1.7,0.9, body extent -1,-0.64 1,0.64, height 1.26
HDR2X5_SMT [mm] "Header, 10-Leads, Body 3.43x6.35mm, Pitch 1.27mm"
  rect 0.76x2.4 smd: 1(-2.54,-1.95) 2(-2.54,1.95) 3(-1.27,-1.95) 4(-1.27,1.95) 5(0,-1.95) 6(0,1.95) 7(1.27,-1.95) 8(1.27,1.95) 9(2.54,-1.95) 10(2.54,1.95)
  round 0 hole 1 unplated: MH1(-1.905,0) MH2(1.905,0)
  silkscreen extent -2.66,-3.83 -2.42,-3.58, body extent -3.17,-1.72 3.17,1.72, height 4.55
MSOP-8 [mm] "MSOP, 8-Leads, Body 3.00x3.00mmPitch 0.65mm, IPC MSOP65P490X110-8N, Medium Density, LTC2053, AD8495, LT6100HMS8PBF"
  rect 0.889x0.42 smd: 1(-2.105,0.975) 2(-2.105,0.325) 3(-2.105,-0.325) 4(-2.105,-0.975) 5(2.105,-0.975) 6(2.105,-0.325) 7(2.105,0.325) 8(2.105,0.975)
  silkscreen extent -2.23,-1.55 1.15,1.86, body extent -1.55,-1.55 1.55,1.55, height 1.1
Net_Tie [mm] "Chip Resistor, 2-Leads, Body 2.00x1.25mm, IPC High Density"
  rect 0.95x1.25 smd: 1(-0.775,0) 2(0.775,0)
  Top Layer lines w0.5: -0.8,0 -0.775,0 0.8,0
  silkscreen extent -1.5,-0.8 1.5,0.8
"PTC Fuse 1206/3216" [mm]
  rect 1x1.8 smd: 1(-1.4,0) 2(1.4,0)
  silkscreen extent -2,-1 2,1, body extent -1.75,-1 1.75,1, height 1
RCU-0C [mm]
  rect 1.15x2.05 smd: 1(0,0)
  body extent -0.6,-0.77 0.6,0.82, height 1.16
"RES 0603/1608" [mm] "Chip Resistor, 2-Leads, Body 1.60x0.80mm, IPC Medium Density"
  rect 0.85x0.95 smd: 1(-0.65,0) 2(0.65,0)
  silkscreen extent -1.27,-0.7 1.27,0.7, body extent -0.8,-0.4 0.8,0.4, height 0.45
"RES 0805/2012" [mm] "Chip Resistor, 2-Leads, Body 2.00x1.25mm, IPC Medium Density"
  rect 1.15x1.35 smd: 1(-0.875,0) 2(0.875,0)
  silkscreen extent -1.7,-0.9 1.7,0.9, body extent -0.95,-0.62 1.05,0.63, height 0.6
SOD123F [mm] "SODFL, 2-Leads, Body 1.80x3.50mm, IPC Low Density"
  rect 1.35x1.45 smd: 1(-1.475,0) 2(1.475,0)
  silkscreen extent -0.38,-0.76 1.75,1.5, body extent -1.75,-0.95 1.75,0.95, height 1.15
SOD-128 [mm] "SOD-128, 2-Leads, Body 2.40x4.70mm, IPC Medium Density"
  rect 0.9x1.9 smd: 1(-2.175,0) 2(2.175,0)
  silkscreen extent -2.57,1.2 -2.48,1.3, body extent -2.35,-1.25 2.35,1.25, height 0.85
SOIC-8 [mm] "SOIC, 8-Leads, Body 4.90x3.90mm, Pitch 1.27mm, IPC Medium Density"
  oval 1.45x0.6 smd: 1(-2.725,1.905) 2(-2.725,0.635) 3(-2.725,-0.635) 4(-2.725,-1.905) 5(2.725,-1.905) 6(2.725,-0.635) 7(2.725,0.635) 8(2.725,1.905)
  silkscreen extent -2.85,-2.5 1.6,2.88, body extent -3,-2.5 3,2.5, height 1.75
SOT23-3 [mm] "SOT23, 3-Leads, Body 2.92x2.37mm, Pitch 0.95mm, IPC Medium Density, NUP2105L"
  rect 0.9x0.8 smd: 1(-1,0.95) 2(-1,-0.95) 3(1,0)
  silkscreen extent -1.13,-1.5 0.7,2.02, body extent -0.7,-1.52 0.7,1.52, height 1.11
"SOT-23 (TO-236)" [mm]
  rect 0.9x0.8 smd: 1(-1,0.95) 2(-1,-0.95) 3(1,0)
  silkscreen extent -1.12,-1.46 0.65,2.02, body extent -0.65,-1.46 0.65,1.46, height 1.11
SSOP-28 [mm] "hi"
  rect 1.65x0.49 smd: 1(-3.625,4.225) 2(-3.625,3.575) 3(-3.625,2.925) 4(-3.625,2.275) 5(-3.625,1.625) 6(-3.625,0.975) 7(-3.625,0.325) 8(-3.625,-0.325) 9(-3.625,-0.975) 10(-3.625,-1.625) 11(-3.625,-2.275) 12(-3.625,-2.925) 13(-3.625,-3.575) 14(-3.625,-4.225) 15(3.625,-4.225) 16(3.625,-3.575) 17(3.625,-2.925) 18(3.625,-2.275) 19(3.625,-1.625) 20(3.625,-0.975) 21(3.625,-0.325) 22(3.625,0.325) 23(3.625,0.975) 24(3.625,1.625) 25(3.625,2.275) 26(3.625,2.925) 27(3.625,3.575) 28(3.625,4.225)
  silkscreen extent -3.75,-5.25 2.4,5.25, body extent -3.9,-5.25 3.9,5.25, height 2
"Superseal 34POS" [mm]
  round 2.2 hole 1.3: A1(0,0) A2(3,0) A3(6,0) A4(9,0) A5(12,0) A6(15,0) A7(18,0) A8(21,0) A9(24,0) A10(1.5,-2.5) A11(4.5,-2.5) A12(7.5,-2.5) A13(10.5,-2.5) A14(13.5,-2.5) A15(16.5,-2.5) A16(19.5,-2.5) A17(22.5,-2.5) A18(1.5,-5.5) A19(4.5,-5.5) A20(7.5,-5.5) A21(10.5,-5.5) A22(13.5,-5.5) A23(16.5,-5.5) A24(19.5,-5.5) A25(22.5,-5.5) A26(0,-8) A27(3,-8) A28(6,-8) A29(9,-8) A30(12,-8) A31(15,-8) A32(18,-8) A33(21,-8) A34(24,-8)
  round 3.3 hole 3.3: MH(-7.25,-14.5) MH(31.25,-14.5)
  silkscreen extent -10.79,-17.91 34.67,2.54, body extent -10.75,-34 34.75,2.5, height 28.16
TECO-1981568-5_V [mm] "SMD, 5-Leads, Body 8x5.9mm, Pitch 0.65mm"
  rect 0.4x1.35 smd: 1(-1.3,0) 2(-0.65,0) 3(0,0) 4(0.65,0) 5(1.3,0)
  rect 1.6x1.4 smd: 6(-3.2,-0.225) 7(3.2,-0.225)
  rect 1.45x1.3 smd: 8(-3.425,-2.675) 9(3.425,-2.675)
  rect 1.9x1.9 smd: 10(-1.2,-2.675) 11(1.2,-2.675)
  silkscreen extent -4,-5.63 4,1.12, body extent -4,-5.5 4,0.1, height 2.79
TQFP64 [mm] "TSQFP, 64-Leads, Body 10.00x10.00mm, Pitch 0.50mm, IPC Medium Density, MKE18F512VLH16"
  rect 1.35x0.3 smd: 1(-5.75,3.75) 2(-5.75,3.25) 3(-5.75,2.75) 4(-5.75,2.25) 5(-5.75,1.75) 6(-5.75,1.25) 7(-5.75,0.75) 8(-5.75,0.25) 9(-5.75,-0.25) 10(-5.75,-0.75) 11(-5.75,-1.25) 12(-5.75,-1.75) 13(-5.75,-2.25) 14(-5.75,-2.75) 15(-5.75,-3.25) 16(-5.75,-3.75) 33(5.75,-3.75) 34(5.75,-3.25) 35(5.75,-2.75) 36(5.75,-2.25) 37(5.75,-1.75) 38(5.75,-1.25) 39(5.75,-0.75) 40(5.75,-0.25) 41(5.75,0.25) 42(5.75,0.75) 43(5.75,1.25) 44(5.75,1.75) 45(5.75,2.25) 46(5.75,2.75) 47(5.75,3.25) 48(5.75,3.75)
  rect 0.3x1.35 smd: 17(-3.75,-5.75) 18(-3.25,-5.75) 19(-2.75,-5.75) 20(-2.25,-5.75) 21(-1.75,-5.75) 22(-1.25,-5.75) 23(-0.75,-5.75) 24(-0.25,-5.75) 25(0.25,-5.75) 26(0.75,-5.75) 27(1.25,-5.75) 28(1.75,-5.75) 29(2.25,-5.75) 30(2.75,-5.75) 31(3.25,-5.75) 32(3.75,-5.75) 49(3.75,5.75) 50(3.25,5.75) 51(2.75,5.75) 52(2.25,5.75) 53(1.75,5.75) 54(1.25,5.75) 55(0.75,5.75) 56(0.25,5.75) 57(-0.25,5.75) 58(-0.75,5.75) 59(-1.25,5.75) 60(-1.75,5.75) 61(-2.25,5.75) 62(-2.75,5.75) 63(-3.25,5.75) 64(-3.75,5.75)
  silkscreen extent -5.87,-4.67 4.67,4.68, body extent -5,-5 5,5, height 1.6